# Altium PCB MB1293Cascii.PcbDoc (part 1 of 2)
Units mm, origin at the board's own origin, x right, y up, seen from the top; angles counter-clockwise.
Board outline 50.63 x 26.23 mm, 2 copper layers (Top Layer, Bottom Layer), stack 1.571 mm thick; 73 components, 55 nets, 560 pads, 45 vias.
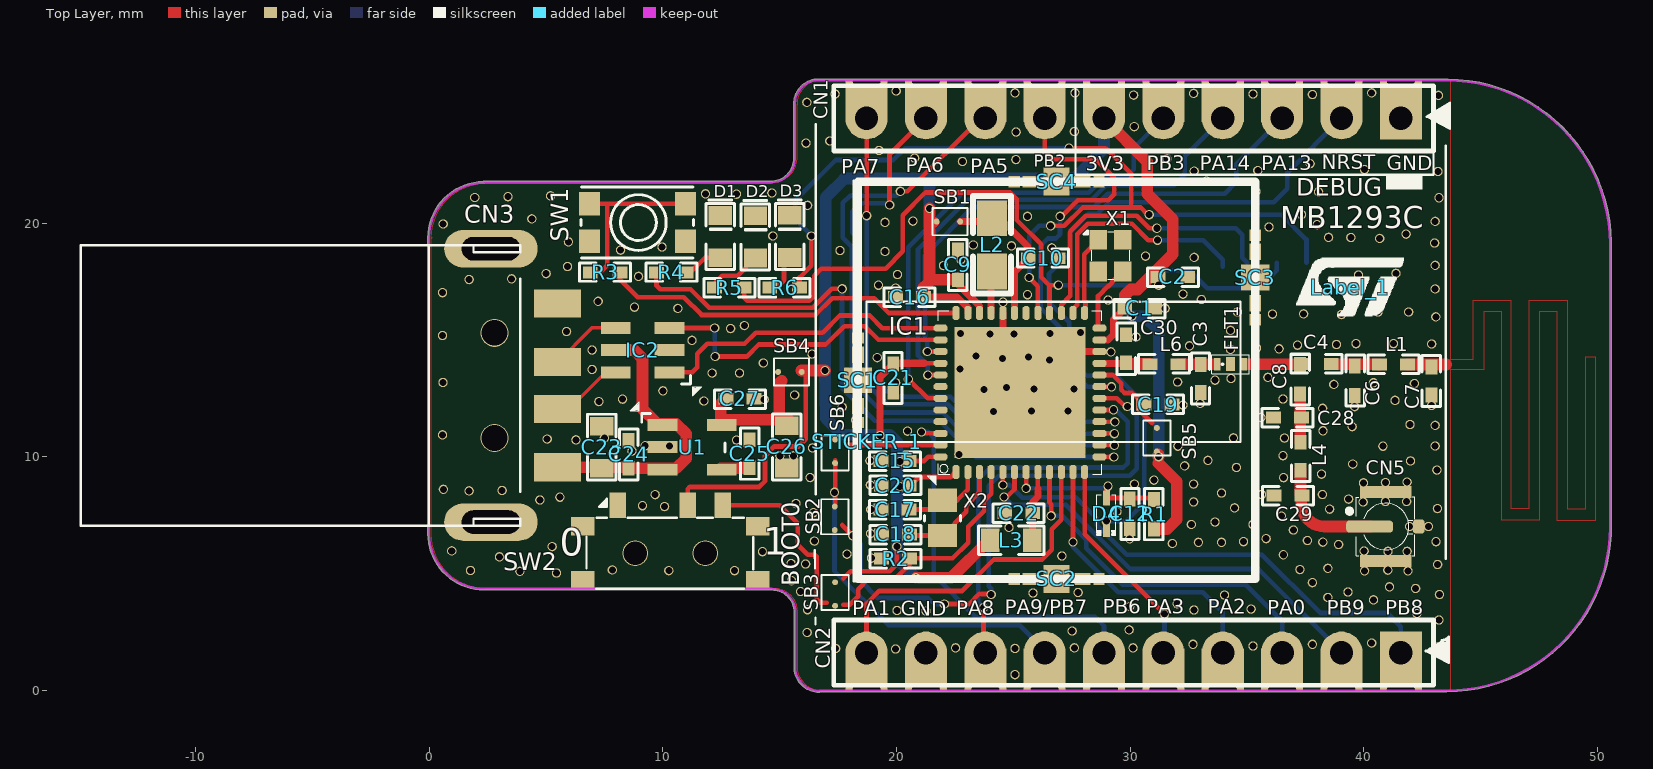
[diagram p0: Top Layer view]
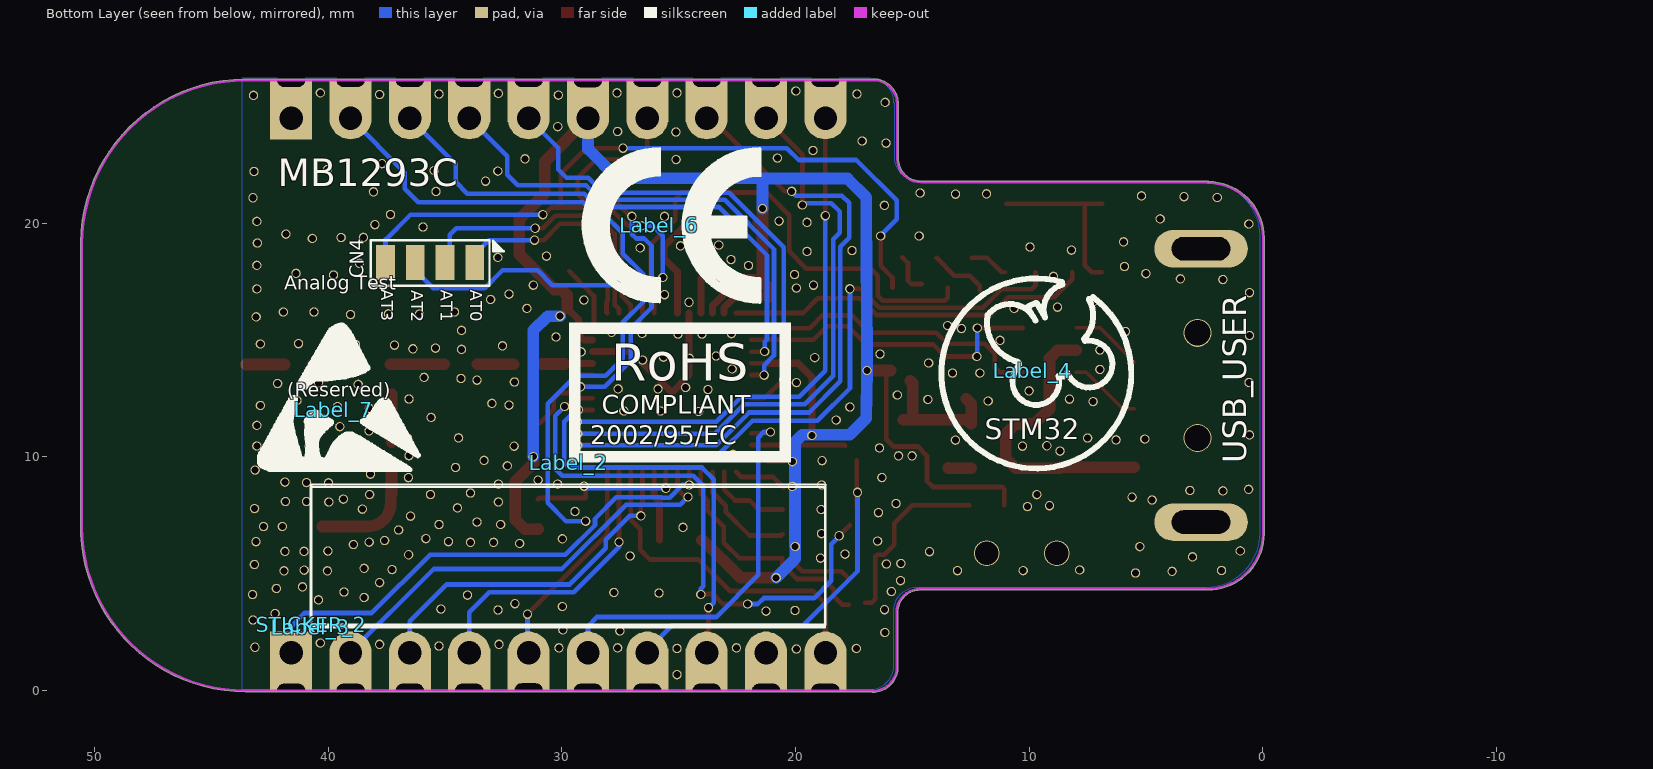
[diagram p1: Bottom Layer view, seen from below]

## Layer stack, top to bottom
Top Solder: solder mask 0.0102, Solder Resist, Dk 4.2
Top Layer: signal copper 0.0356
Dielectric1: prepreg 1.5, FR-4, Dk 4.4
Bottom Layer: signal copper 0.0356
Bottom Solder: solder mask 0.0102, Solder Resist, Dk 4.2

## Board outline
-0.051,6.716 cw(c-0.001,6.716) -0.051,6.724 -0.051,19.377 cw(c2.356,19.377) 2.326,21.783 cw(c2.356,21.743) 2.356,21.793 3.843,21.793 cw(c3.87,21.751) 3.87,21.801 14.63,21.801 cw(c14.63,21.751) 14.632,21.801 ccw(c14.63,22.771) 15.599,22.768 ccw(c14.63,22.771) 15.599,22.769 15.599,22.768 cw(c15.65,22.771) 15.599,22.773 15.599,25.101 cw(c16.67,25.101) 16.66,26.171 cw(c16.67,26.122) 16.67,26.172 43.568,26.172 cw(c43.568,26.122) 43.586,26.169 cw(c43.528,19.118) 50.578,19.194 cw(c50.53,19.178) 50.58,19.178 50.58,6.711 cw(c50.53,6.711) 50.573,6.685 cw(c43.53,7.001) 43.548,-0.05 cw(c43.54,0) 43.54,-0.05 16.72,-0.05 cw(c16.69,-0.01) 16.69,-0.06 cw(c16.69,1.01) 15.619,1.01 cw(c15.67,1.01) 15.625,1.033 15.625,3.341 cw(c15.675,3.341) 15.629,3.362 ccw(c14.66,3.341) 14.66,4.31 cw(c14.66,4.361) 14.63,4.32 2.385,4.32 cw(c2.355,4.361) 2.355,4.31 cw(c2.355,6.716)

## Design rules (kind name [scope] priority, off if disabled: settings)
AssemblyTestPointUsage [All] p0 off: scope1count=1 scope1_0_kind=Board scope1_0_value=Board scope2count=1 scope2_0_kind=Board scope2_0_value=Board commentlength=0
AssemblyTestPointUsage [All] p1 off:
AssemblyTestpoint [All] p0 off: scope1count=1 scope1_0_kind=Board scope1_0_value=Board scope2count=1 scope2_0_kind=Board scope2_0_value=Board commentlength=0
AssemblyTestpoint [All] p1 off: testpointundercomponent=TRUE minsize=1.016 maxsize=2.54 preferedsize=1.524 minholesize=0 maxholesize=1.016 preferedholesize=0.813 testpointgrid=0.025 usegrid=TRUE gridtolerance=0 allowsidetop=TRUE allowsidebottom=TRUE
Clearance Clearance_1 [All] p0: scope1count=1 scope1_0_kind=Board scope1_0_value=Board scope2count=1 scope2_0_kind=Board scope2_0_value=Board commentlength=0 gap=0.1
Clearance Clearance_PolyTop [All] p0 off: scope1count=1 scope1_0_kind=Board scope1_0_value=Board scope2count=1 scope2_0_kind=Layer scope2_0_value=TOP commentlength=48 gap=0.115 // Protel DXP Scope 1 Expression Was: InPolygon
Clearance Clearance_PolyTop [InPolygon vs OnLayer('Top Layer')] p1: gap=0.115 ignorepadtopadclearanceinfootprint=FALSE except(0: Arc-Hole Track-Hole SMDPad-Hole THPad-Hole Via-Hole Fill-Hole Poly-Hole Region-Hole Text-Hole)
Clearance Clearance_1 [All] p2: gap=0.1 ignorepadtopadclearanceinfootprint=FALSE except(0: Arc-Hole Track-Hole SMDPad-Hole THPad-Hole Via-Hole Fill-Hole Poly-Hole Region-Hole Text-Hole)
ComponentClearance [All] p0 off: scope1count=1 scope1_0_kind=Board scope1_0_value=Board scope2count=1 scope2_0_kind=Board scope2_0_value=Board commentlength=0 gap=0 collisioncheckmode=3
ComponentClearance [All] p1 off: gap=0 collisioncheckmode=3 verticalgap=0.254 showdistances=FALSE
DiffPairsRouting [All] p0: scope1count=1 scope1_0_kind=Board scope1_0_value=Board scope2count=1 scope2_0_kind=Board scope2_0_value=Board commentlength=0
DiffPairsRouting [All] p1: maxlimit=0.254 minlimit=0.254 mostfreqgap=0.254 toplayer_minwidth=0.1 toplayer_maxwidth=0.381 toplayer_prefwidth=0.381 bottomlayer_minwidth=0.1 bottomlayer_maxwidth=0.381 bottomlayer_prefwidth=0.381 maxuncoupledlength=12.7
FabricationTestPointUsage TestPointUsage [All] p0 off: scope1count=1 scope1_0_kind=Board scope1_0_value=Board scope2count=1 scope2_0_kind=Board scope2_0_value=Board commentlength=0 valid=0 allowmultiple=FALSE
FabricationTestPointUsage TestPointUsage [All] p1 off: valid=0 allowmultiple=FALSE
FabricationTestpoint Testpoint [All] p0 off: scope1count=1 scope1_0_kind=Board scope1_0_value=Board scope2count=1 scope2_0_kind=Board scope2_0_value=Board commentlength=0 side=3 testpointundercomponent=TRUE minsize=1.016 maxsize=2.54 preferedsize=1.524 minholesize=0.508 maxholesize=1.016 preferedholesize=0.813 testpointgrid=0.025
FabricationTestpoint Testpoint [All] p1 off: side=3 testpointundercomponent=TRUE minsize=1.016 maxsize=2.54 preferedsize=1.524 minholesize=0.508 maxholesize=1.016 preferedholesize=0.813 testpointgrid=0.025 allowsidetop=TRUE allowsidebottom=TRUE usegrid=TRUE gridtolerance=0
FanoutControl Fanout_Default [All] p0 off: scope1count=1 scope1_0_kind=Board scope1_0_value=Board scope2count=1 scope2_0_kind=Board scope2_0_value=Board commentlength=30 // Fanout_Default (Default Rule)
FanoutControl Fanout_Small [All] p0 off: scope1count=1 scope1_0_kind=Board scope1_0_value=Board scope2count=1 scope2_0_kind=Board scope2_0_value=Board commentlength=84 // Protel DXP Scope 1 Expression Was: (CompPinCount < 5)   Fanout_Small (Default Rule)
FanoutControl Fanout_SOIC [All] p0 off: scope1count=1 scope1_0_kind=Board scope1_0_value=Board scope2count=1 scope2_0_kind=Board scope2_0_value=Board commentlength=71 // Protel DXP Scope 1 Expression Was: IsSOIC   Fanout_SOIC (Default Rule)
FanoutControl Fanout_LCC [All] p0 off: scope1count=1 scope1_0_kind=Board scope1_0_value=Board scope2count=1 scope2_0_kind=Board scope2_0_value=Board commentlength=69 // Protel DXP Scope 1 Expression Was: IsLCC   Fanout_LCC (Default Rule)
FanoutControl Fanout_BGA [All] p0 off: scope1count=1 scope1_0_kind=Board scope1_0_value=Board scope2count=1 scope2_0_kind=Board scope2_0_value=Board commentlength=69 // Protel DXP Scope 1 Expression Was: IsBGA   Fanout_BGA (Default Rule)
FanoutControl Fanout_BGA [IsBGA] p1 off: bgadir=Out bgaviamode=Centered fanoutstyle=Auto fanoutdirection=Alternating viagrid=0.025 // Fanout_BGA (Default Rule)
FanoutControl Fanout_LCC [IsLCC] p2 off: bgadir=Out bgaviamode=Centered fanoutstyle=Auto fanoutdirection=Alternating viagrid=0.025 // Fanout_LCC (Default Rule)
FanoutControl Fanout_SOIC [IsSOIC] p3 off: bgadir=Out bgaviamode=Centered fanoutstyle=Auto fanoutdirection=Alternating viagrid=0.025 // Fanout_SOIC (Default Rule)
FanoutControl Fanout_Small [(CompPinCount < 5)] p4 off: bgadir=Out bgaviamode=Centered fanoutstyle=Auto fanoutdirection=OutThenIn viagrid=0.025 // Fanout_Small (Default Rule)
FanoutControl Fanout_Default [All] p5 off: bgadir=Out bgaviamode=Centered fanoutstyle=Auto fanoutdirection=Alternating viagrid=0.025 // Fanout_Default (Default Rule)
Height [All] p0: scope1count=1 scope1_0_kind=Board scope1_0_value=Board scope2count=1 scope2_0_kind=Board scope2_0_value=Board commentlength=0
HoleSize [All] p0: scope1count=1 scope1_0_kind=Board scope1_0_value=Board scope2count=1 scope2_0_kind=Board scope2_0_value=Board commentlength=0 absolutevalues=TRUE maxlimit=3.5 minlimit=0.2 maxpercent=80.000 minpercent=20.000
HoleSize [All] p1: absolutevalues=TRUE maxlimit=3.5 minlimit=0.2 maxpercent=80.000 minpercent=20.000
HoleToHoleClearance [All] p0 off: scope1count=1 scope1_0_kind=Board scope1_0_value=Board scope2count=1 scope2_0_kind=Board scope2_0_value=Board commentlength=0
HoleToHoleClearance [All] p1 off: gap=0.254 allowstackedmicrovias=TRUE
LayerPairs [All] p0: scope1count=1 scope1_0_kind=Board scope1_0_value=Board scope2count=1 scope2_0_kind=Board scope2_0_value=Board commentlength=0 enforce=TRUE
MinimumSolderMaskSliver [All] p0 off: scope1count=1 scope1_0_kind=Board scope1_0_value=Board scope2count=1 scope2_0_kind=Board scope2_0_value=Board commentlength=0
MinimumSolderMaskSliver [All] p1 off: minsoldermaskwidth=0.254
NetAntennae [All] p0 off: scope1count=1 scope1_0_kind=Board scope1_0_value=Board scope2count=1 scope2_0_kind=Board scope2_0_value=Board commentlength=0
NetAntennae [All] p1 off: netantennaetolerance=0
PasteMaskExpansion [All] p0 off: scope1count=1 scope1_0_kind=Board scope1_0_value=Board scope2count=1 scope2_0_kind=Board scope2_0_value=Board commentlength=0 expansion=0
PasteMaskExpansion [All] p1 off: expansion=0
PlaneClearance [All] p0: scope1count=1 scope1_0_kind=Board scope1_0_value=Board scope2count=1 scope2_0_kind=Board scope2_0_value=Board commentlength=0 clearance=0.508
PlaneConnect [All] p0: scope1count=1 scope1_0_kind=Board scope1_0_value=Board scope2count=1 scope2_0_kind=Board scope2_0_value=Board commentlength=0 planeconnectstyle=Relief reliefexpansion=0.508 reliefentries=4 reliefconductorwidth=0.254 reliefairgap=0.254
PolygonConnect [All] p0: scope1count=1 scope1_0_kind=Board scope1_0_value=Board scope2count=1 scope2_0_kind=Board scope2_0_value=Board commentlength=0 connectstyle=Direct reliefconductorwidth=0.254 reliefentries=4 polygonreliefangle="90 Angle"
PolygonConnect [All] p1: connectstyle=Direct reliefconductorwidth=0.254 reliefentries=4 polygonreliefangle="90 Angle" airgapwidth=0.254
RoutingCorners [All] p0: scope1count=1 scope1_0_kind=Board scope1_0_value=Board scope2count=1 scope2_0_kind=Board scope2_0_value=Board commentlength=0 cornerstyle=45-Degree minsetback=2.54 maxsetback=2.54
RoutingLayers [All] p0: scope1count=1 scope1_0_kind=Board scope1_0_value=Board scope2count=1 scope2_0_kind=Board scope2_0_value=Board commentlength=0 top layer=Horizontal bottom layer=Vertical
RoutingPriority [All] p0: scope1count=1 scope1_0_kind=Board scope1_0_value=Board scope2count=1 scope2_0_kind=Board scope2_0_value=Board commentlength=0
RoutingTopology [All] p0 off: scope1count=1 scope1_0_kind=Board scope1_0_value=Board scope2count=1 scope2_0_kind=Board scope2_0_value=Board commentlength=0 topology=Shortest
RoutingTopology [All] p1 off: topology=Shortest
RoutingVias [All] p0: scope1count=1 scope1_0_kind=Board scope1_0_value=Board scope2count=1 scope2_0_kind=Board scope2_0_value=Board commentlength=0 holewidth=0.4 width=0.6 viastyle="Through Hole" minholewidth=0.2 minwidth=0.3 maxholewidth=6 maxwidth=10
RoutingVias [All] p1: holewidth=0.4 width=0.6 viastyle="Through Hole" minholewidth=0.2 minwidth=0.3 maxholewidth=6 maxwidth=10
ShortCircuit [All] p0: scope1count=1 scope1_0_kind=Board scope1_0_value=Board scope2count=1 scope2_0_kind=Board scope2_0_value=Board commentlength=0 allowed=FALSE
SilkToBoardRegionClearance [All] p0 off: scope1count=1 scope1_0_kind=Board scope1_0_value=Board scope2count=1 scope2_0_kind=Board scope2_0_value=Board commentlength=0
SilkToBoardRegionClearance [All] p1 off:
SilkToSilkClearance [All] p0 off: scope1count=1 scope1_0_kind=Board scope1_0_value=Board scope2count=1 scope2_0_kind=Board scope2_0_value=Board commentlength=0
SilkToSilkClearance [All] p1 off: silktosilkclearance=0.254
SilkToSolderMaskClearance SilkscreenOverComponentPads [All] p0 off: scope1count=1 scope1_0_kind=Board scope1_0_value=Board scope2count=1 scope2_0_kind=Board scope2_0_value=Board commentlength=44 // Protel DXP Scope 1 Expression Was: IsPad
SilkToSolderMaskClearance SilkscreenOverComponentPads [IsPad] p1 off: minsilkscreentomaskgap=0.254 clearancetoexposedcopper=TRUE
SolderMaskExpansion [All] p0 off: scope1count=1 scope1_0_kind=Board scope1_0_value=Board scope2count=1 scope2_0_kind=Board scope2_0_value=Board commentlength=0 expansion=0.102
SolderMaskExpansion [All] p1 off: expansion=0.102 istentingtop=FALSE
UnRoutedNet [All] p0: scope1count=1 scope1_0_kind=Board scope1_0_value=Board scope2count=1 scope2_0_kind=Board scope2_0_value=Board commentlength=0
UnpouredPolygon [All] p0: scope1count=1 scope1_0_kind=Board scope1_0_value=Board scope2count=1 scope2_0_kind=Board scope2_0_value=Board commentlength=0
Width [All] p0: scope1count=1 scope1_0_kind=Board scope1_0_value=Board scope2count=1 scope2_0_kind=Board scope2_0_value=Board commentlength=0 maxlimit=5 minlimit=0.1 preferedwidth=0.2
Width [All] p1: maxlimit=5 minlimit=0.1 preferedwidth=0.2 minimp=50.000000 maximp=50.000000 favimp=50.000000
10 further rules are at their usual default settings.

## Classes and differential pairs
component class Schematic: C1 C2 C3 C4 C6 C7 C8 C9 C10 C12 C15 C16 C17 C18 C19 C20 C21 C22 C23 C24 C25 C26 C27 C28 C29 C30 CN1 CN2 CN3 CN4 CN5 D1 D2 D3 D4 FLT1 IC1 IC2 L1 L2 L3 L4 L6 R1 R2 R3 R4 R5 R6 R39 R40 R41 SB1 SB2 SB3 SB4 SB5 SB6 SC1 SC2 SC3 SC4 SW1 SW2 U1 X1 X2
component class Project_Overview: Label_1 Label_2 Label_3 Label_4 Label_5 Label_6 Label_7 Label_9 STICKER_2
differential pair " ": +USB_P -USB_N

## Components (designator, comment, footprint, x,y, rotation, side; value= is the part's Value field where it differs from the comment)
C1 "100nF" 0402_CAP_NPOL#1 30.404,16.358 r180 top
C2 "100pF" 0402_CAP_NPOL#1 31.826,17.704 r180 top
C3 "0.3pF" 0402_CAP_NPOL#2 33.02,13.36 r90 top
C4 "10nF" 0402_CAP_NPOL#1 37.97,13.974 r0 top
C6 "NF" 0402_CAP_NPOL#1 39.61,13.264 r270 top
C7 "1.5pF" 0402_CAP_NPOL#2 42.9,13.254 r90 top
C8 "NF" 0402_CAP_NPOL#1 37.27,13.324 r270 top
C9 "4.7uF" 0402_CAP_NPOL#1 22.631,18.217 r90 top
C10 "4.7uF" 0402_CAP_NPOL#1 26.27,18.501 r0 top
C12 "100nF" 0402_CAP_NPOL#1 29.98,7.561 r270 top
C15 "100nF" 0402_CAP_NPOL#2 19.94,9.831 r180 top
C16 "100nF" 0402_CAP_NPOL#2 20.56,16.841 r180 top
C17 "10pF" 0402_CAP_NPOL#2 19.94,7.751 r180 top
C18 "10pF" 0402_CAP_NPOL#2 19.96,6.691 r180 top
C19 "100nF" 0402_CAP_NPOL#2 31.191,12.243 r0 top
C20 "100nF" 0402_CAP_NPOL#2 19.95,8.771 r0 top
C21 "100nF" 0402_CAP_NPOL#2 19.863,13.386 r90 top
C22 "100nF" 0402_CAP_NPOL#2 25.23,7.601 r180 top
C23 "1uF" 0603_CAP_NPOL 7.391,10.419 r270 top
C24 "100nF" 0402_CAP_NPOL#2 8.534,10.114 r270 top
C25 "10nF" 0402_CAP_NPOL#2 13.716,10.14 r270 top
C26 "1uF" 0603_CAP_NPOL 15.3,10.431 r90 top
C27 "100nF" 0402_CAP_NPOL#2 13.3,12.491 r180 top
C28 "NF" 0402_CAP_NPOL#2 36.728,11.684 r180 top
C29 "NF" 0402_CAP_NPOL#2 36.754,8.357 r180 top
C30 "0.8pF" 0402_CAP_NPOL#2 29.82,14.63 r270 top
CN1 "HEADER_1X10" "Header M/F 1x10x2.54 NF" 41.58,24.491 r180 top
CN2 "HEADER_1X10" "Header M/F 1x10x2.54 NF" 41.58,1.631 r180 top
CN3 "USB_1" USB/A_M1 3.9,13.061 r90 top
CN4 "HEADER_1X4" SIL4_127_B 33.731,18.313 r270 bottom
CN5 "UFL" UFL 40.93,7.024 r90 top (schematic designator J2)
D1 "LED BLUE" 0603_LED_Blue 12.466,19.43 r270 top
D2 "LED GREEN" 0603_LED_GREEN 13.966,19.42 r270 top
D3 "LED RED" 0603_LED_RED 15.426,19.44 r270 top
D4 "BAT54K" SOD523 28.98,7.571 r270 top
FLT1 "LFB182G45CGFD436" LFB182G45CGFD436 34.29,13.97 r0 top
IC1 "STM32WBxx_QFN48" STM32WBxx_QFN48 25.29,12.761 r90 top
IC2 "USBLC6-2" SOT23-6 10.29,13.621 r180 top
L1 "3.6nH" 0402_COIL 41.27,13.954 r0 top
L2 "10uH" 0805_COIL 24.09,20.221 r270 top
L3 "FCM1608KF-601T03" 0603_COIL 24.91,6.441 r0 top
L4 "0R" 0402_COIL 37.28,10.034 r270 top
L6 "2.7nH" 0402_COIL 31.445,13.97 r0 top
Label_1 "LOGO_ST" LOGO_ST_Size2 39.421,17.272 r0 top
Label_2 "LOGO_ROHS" SYMBOL_RoHS 29.693,9.754 r180 bottom
Label_3 "LOGO_StickerArea_Prod_Reservation" LOGO_Sticker_Area 40.742,2.718 r180 bottom
Label_4 "LOGO_STM32" LOGO_STM32 9.855,13.691 r180 bottom
Label_6 "LOGO_CE" "LOGO CE" 25.832,19.914 r180 bottom
Label_7 "LOGO_ESD" "LOGO ESD" 39.751,12.014 r180 bottom
R1 "100K" 0402_RES#1 31.02,7.551 r90 top
R2 "10K" 0402_RES#2 19.96,5.651 r180 top
R3 "1K" 0402_RES#1 7.53,17.901 r0 top
R4 "680" 0402_RES#1 10.37,17.901 r0 top
R5 "680" 0402_RES#1 12.852,17.247 r180 top
R6 "680" 0402_RES#1 15.215,17.247 r180 top
SB1 "Open" SB-tiny 22.225,20.071 r180 top
SB2 "Close" SB-tiny 17.36,7.378 r270 top
SB3 "Open" SB-tiny 17.374,4.14 r270 top
SB4 "Close" SB-tiny 15.443,13.64 r180 top
SB5 "Open" SB-tiny 31.14,10.744 r270 top
SB6 "Open" SB-tiny 17.374,10.236 r90 top
SC1 "Shield Clip_A 3.9x1.1x1.28" "Shield Clip_A 3.9x1.1x1.28" 18.35,13.28 r90 top locked
SC2 "Shield Clip_A 3.9x1.1x1.28" "Shield Clip_A 3.9x1.1x1.28" 26.85,4.78 r180 top
SC3 "Shield Clip_A 3.9x1.1x1.28" "Shield Clip_A 3.9x1.1x1.28" 35.35,17.678 r90 top
SC4 "Shield Clip_A 3.9x1.1x1.28" "Shield Clip_A 3.9x1.1x1.28" 26.85,21.78 r180 top locked
SH1 "Shield 17.2x17.2x3" "SHIELD 17.2X17.2X3" 0.356,-23.927 r0 top
STICKER_1 "FCC_ID_Sticker_16x6" "Sticker_FCC_ID 16x6mm" 18.72,10.643 r0 top
STICKER_2 "Sticker_Prod_22x6" Sticker_Prod_22x6mm 40.716,2.819 r180 bottom
SW1 "User PB" "SW-PB SMD KMR2" 8.92,20.031 r180 top
SW2 "MLL1200S_TE" MLL1200S_TE 10.32,5.881 r0 top
U1 "LD3985M33R" SOT23-5 11.26,10.408 r0 top
X1 "NX2016_32MHz" NX2016_4P 29.159,18.618 r270 top
X2 "NX2012_32K768Hz" NX2012_2P 21.97,8.141 r270 top

## Footprints (in the part's own frame and the unit in brackets; to place one, negate y for a bottom-side part, rotate by r counter-clockwise, add the part's x,y. Pads: shape width x height; smd on the part's side, far side on the other; paste and mask are expansions set on the pad)
0402_CAP_NPOL#1 [mil] "Capacitor FootPrint 0402"
  rect 25x20 smd: 1(-25,0) 2(25,0)
  silkscreen extent -43,-15 43,16
0402_CAP_NPOL#2 [mil] "Capacitor FootPrint 0402"
  rect 25x20 smd: 1(-23.58,0) 2(23.58,0)
  silkscreen extent -43,-15 43,16
0402_COIL [mil] "Coil FootPrint 0402"
  rect 25x20 smd: 1(-23.58,0) 2(23.58,0)
  silkscreen extent -43,-15 43,16
0402_RES#1 [mil] "Resistor FootPrint 0402"
  rect 25x20 smd: 1(-25,0) 2(25,0)
  silkscreen extent -43,-15 43,16
0402_RES#2 [mil] "Resistor FootPrint 0402"
  rect 25x20 smd: 1(-23.58,0) 2(23.58,0)
  silkscreen extent -43,-15 43,16
0603_CAP_NPOL [mm] "Capacitor FootPrint 0603"
  rect 0.8x1 smd: 1(-0.902,0) 2(0.902,0)
  silkscreen extent -1.41,-0.61 1.41,0.61
0603_COIL [mm] "Coil Footprint 0603"
  rect 0.8x1 smd: 1(-0.902,0) 2(0.902,0)
  silkscreen extent -1.41,-0.61 1.41,0.61
0603_LED_Blue [mm] "Resistor Footprint 0603"
  rect 0.8x1 smd: A(0.902,0) K(-0.902,0)
  silkscreen extent -1.59,-0.61 1.41,0.61
0603_LED_GREEN [mm] "Resistor Footprint 0603"
  rect 0.8x1 smd: A(0.902,0) K(-0.902,0)
  silkscreen extent -1.59,-0.61 1.41,0.61
0603_LED_RED [mm] "Resistor Footprint 0603"
  rect 0.8x1 smd: A(0.902,0) K(-0.902,0)
  silkscreen extent -1.59,-0.61 1.41,0.61
0805_COIL [mil] "Coil FootPrint 0805"
  rect 60x50 smd: 1(0,0) 2(90,0)
  silkscreen extent -37,-32 127,32
"Header M/F 1x10x2.54 NF" [mm] "1x10x2.54 Header Not Fitted"
  rect 1.8x1.8 hole 1: 1(0,0)
  round 1.8 hole 1: 2(2.54,0) 3(5.08,0) 4(7.62,0) 5(10.16,0) 6(12.7,0) 7(15.24,0) 8(17.78,0) 9(20.32,0) 10(22.86,0)
  silkscreen extent -1.4,-1.4 24.26,1.4
LFB182G45CGFD436 [mm] "Band Pass Filter Murata LFB182G45CGFD436"
  rect 0.28x0.55 smd mask+0: 1(-0.56,0) 3(0.56,0)
  rect 0.4x0.6 smd mask+0: 2(0,0)
  silkscreen extent -0.8,-0.4 0.8,0.4
"LOGO CE" [mm]
  silkscreen extent -3.27,-3.31 4.33,3.3
"LOGO ESD" [mm]
  silkscreen extent -3.23,-2.59 3.66,3.68
LOGO_ST_Size2 [mm]
  silkscreen extent -2.31,-1.22 2.29,1.24
LOGO_Sticker_Area [mm] "Sticker Area reservation 22x6 mm"
  silkscreen extent 0,0 22,6
LOGO_STM32 [mm]
  silkscreen extent -3.9,-4.18 4.22,3.95
MLL1200S_TE [mm] "1RT switch"
  rect 1x0.8 smd mask+0: 0(-3.75,-1.15) 0(-3.75,1.15) 0(3.75,-1.15) 0(3.75,1.15)
  round 1.1 hole 1 mask+0: 0(-1.5,0) 0(1.5,0)
  rect 0.7x1.1 smd mask+0: 1(-2.25,2.05) 2(0.75,2.05) 3(2.25,2.05)
  silkscreen extent -3.58,-1.52 3.56,2.34
NX2012_2P [mm]
  rect 1x1.25 smd: 1(0,0) 2(1.5,0)
  silkscreen extent 0.63,-0.76 0.89,0.76
NX2016_4P [mm]
  rect 0.85x0.75 smd mask+0: 1(-0.675,-0.525) 2(0.675,-0.525) 3(0.675,0.525) 4(-0.675,0.525)
  silkscreen extent -1.07,-1.16 1.02,0.81
SB-tiny [mil]
  round 10 smd paste-10 mask+0: 1(-19.69,0)
  round 10 smd paste-10.08 mask+0: 2(20,0)
  silkscreen extent -32,-23 27,23
"SHIELD 17.2X17.2X3" [mm] "Metallic Shield 17.2x17.2mm height =3mm tickness=0.2mm"
  silkscreen extent 17.81,28.6 35.08,45.75
"Shield Clip_A 3.9x1.1x1.28" [mm] "Shield Clip 3.9x1.1x1.28 - Harwin S0951-46R - Full pad"
  rect 0.48x0.5 smd mask+0: 1(-1.81,0) 1(1.81,0)
  rect 0.7x0.5 smd mask+0: 1(-1.1,0) 1(1.1,0)
  rect 1.1x1.2 smd mask+0: 1(0,0)
SIL4_127_B [mm]
  rect 1.5x0.8 smd: 1(0,0) 2(0,-1.27) 3(0,-2.54) 4(0,-3.81)
  silkscreen extent -0.97,-4.44 0.99,1.24
SOD523 [mm]
  rect 0.65x0.3 smd mask+0: A(-0.675,0) K(0.675,0)
  silkscreen extent -0.81,-0.41 0.91,0.41
SOT23-5 [mil]
  rect 50x20 smd: 1(-50,37.5) 2(-50,0.5) 3(-50,-37.5) 4(50,-37.5) 5(50,37.5)
  silkscreen extent -104,-8 55,77
SOT23-6 [mm]
  rect 1.27x0.508 smd: 1(0,0) 2(0,-0.95) 3(0,-1.9) 4(2.3,-1.9) 5(2.3,-0.95) 6(2.3,0)
  silkscreen extent -1.37,0.13 -0.51,1
"Sticker_FCC_ID 16x6mm" [mm] "Sticker_FCC_ID 16x6mm White"
  silkscreen extent 0,0 16,6
Sticker_Prod_22x6mm [mm] "Sticker_Prod_22x6mm White"
  silkscreen extent 0,0 22,6
STM32WBxx_QFN48 [mm] "QFN48 7x7x0.55mm pitch 0.5mm"
  oct 0.6x0.3 smd mask+0: 1(-3.398,2.746) 2(-3.398,2.239) 3(-3.398,1.739) 4(-3.398,1.239) 5(-3.398,0.739) 6(-3.398,0.239) 7(-3.398,-0.261) 8(-3.398,-0.761) 9(-3.398,-1.261) 10(-3.398,-1.761) 11(-3.398,-2.261) 12(-3.398,-2.761) 25(3.398,-2.761) 26(3.398,-2.261) 27(3.398,-1.761) 28(3.398,-1.261) 29(3.398,-0.761) 30(3.398,-0.261) 31(3.398,0.239) 32(3.398,0.739) 33(3.398,1.239) 34(3.398,1.739) 35(3.398,2.239) 36(3.398,2.739)
  oct 0.3x0.6 smd mask+0: 13(-2.752,-3.399) 14(-2.252,-3.399) 15(-1.752,-3.399) 16(-1.252,-3.399) 17(-0.752,-3.399) 18(-0.252,-3.399) 19(0.248,-3.399) 20(0.748,-3.399) 21(1.248,-3.399) 22(1.748,-3.399) 23(2.248,-3.399) 24(2.748,-3.399) 37(2.748,3.399) 38(2.248,3.399) 39(1.748,3.399) 40(1.248,3.399) 41(0.748,3.399) 42(0.248,3.399) 43(-0.252,3.399) 44(-0.752,3.399) 45(-1.252,3.399) 46(-1.752,3.399) 47(-2.252,3.399) 48(-2.752,3.399)
  rect 5.6x5.6 smd paste-3 mask+0: 49(0,0)
  silkscreen extent -3.95,-3.5 3.5,3.96
"SW-PB SMD KMR2" [mm]
  rect 0.9x1 smd: 1(-2.05,0.8) 1(2.05,0.8) 2(-2.05,-0.8) 2(2.05,-0.8)
  silkscreen extent -2.4,-1.52 2.42,1.53
SYMBOL_RoHS [mm]
  silkscreen extent 0,0 9.5,6
UFL [mm] "UFL RF connector SMD"
  rrect50% 0.5x2 smd: 1(0,0.686)
  rect 0.5x2.2 smd: 2(-1.475,0) 2(1.475,0)
  rrect50% 0.6x0.5 smd: 2(0,-1.422)
  silkscreen extent -1.25,-1.25 1.27,1.6
USB/A_M1 [mm]
  round 1.2 hole 1.1: 0(-2.25,1.1) 0(2.25,1.1)
  rect 1.2x2 smd: 1(-3.5,-1.6) 2(-1,-1.6) 3(1,-1.6) 4(3.5,-1.6)
  oval 1.6x4 hole 1 slot 2.5 at 90 deg: 5(-5.85,1.25) 5(5.85,1.25)
  silkscreen extent -6,0 6,18.8

## Part data
C1 C2 C3 C4 C6 C7 C8 C9 C10 C12 C15 C16 C17 C18 C19 C20 C21 C22 C23 C24 C25 C26 C27 C28 C29 C30: library part CAP_NPOL, "Capacitor_not polarized"
D1 D2 D3: library part LED, "Light-Emitting Diode"
D4: "Schottky Diode"
FLT1: "Band Pass Filter Murata LFB182G45CGFD436"
L1 L4 L6: library part INDUCTOR_SMD_STDL
L2: library part IND_74479777310A, "Coil Wurtz 10uH ref: 74479777310A"
L3: library part IND_FCM1608KF-601T03
Label_3: "Area Resevation for Prod Sticker 22x6mm"
R1 R2 R3 R4 R5 R6: library part RES, "Resistor"
SB1 SB2 SB3 SB4 SB5 SB6: library part Strap2, "Solder Jumper"
SC1 SC2 SC3 SC4: "Harwin S0951-46R"
SH1: library part Shield, "Shield"
STICKER_1: library part LOGO_Sticker_FCC_ID, "Sticker for FCC_ID 16x6mm"
STICKER_2: library part LOGO_Sticker_Prod, "Prod Sticker 22x6mm"
SW1: library part SW-PB_1, "Push-button SMD"
U1: "3.3V low drop voltage regulator"
X1: library part NX2016_32M, "Crystal NDK 2.0x1.6mm  32 MHz"
X2: library part NX2012_32K768, "Crystal NDK 2.0x1.2mm  32.768 KHz"

## Free pads (board coordinates)
  rect 1.8x1.8 hole 0.6 slot 1.2 at 0 deg copper offset 0,0.9 mask+0: 2(18.72,-0.005) 2(21.26,-0.005) 2(23.8,-0.005) 2(26.34,-0.005) 2(28.88,-0.005) 2(31.42,0.01) 2(33.96,-0.005) 2(36.5,-0.005) 2(39.04,-0.005) 2(41.58,-0.005)
  rect 1.8x1.8 hole 0.6 slot 1.2 at 0 deg copper offset 0,-0.9 mask+0: 2(18.72,26.136) 2(21.26,26.136) 2(23.8,26.136) 2(26.34,26.136) 2(28.88,26.121) 2(31.42,26.136) 2(33.96,26.136) 2(36.5,26.136) 2(39.04,26.136) 2(41.58,26.136)
  round 0.4 hole 0.3 mask+0: 24(29.98,6.501) 25(7.5,10.811) 26(10.29,10.461) 27(8.68,10.251) 28(13.16,10.721) 29(15.01,10.051) 30(15.59,10.051) 31(9.25,10.481) 32(14.34,12.461) 33(19.507,20.041) 34(27.61,23.927) 35(29.17,14.501) 36(18.93,5.671) 37(18.89,6.721) 38(18.9,7.751) 39(18.88,8.801) 40(18.86,9.841) 41(20.14,9.801) 42(20.14,8.741) 43(24.56,16.621) 44(42.9,12.204) 45(39.6,12.154) 46(35.59,11.694) 47(35.62,8.394) 48(39.98,8.894) 49(40.92,8.904) 50(41.85,8.924) 51(39.97,8.074) 52(40.92,8.094) 53(41.83,8.094) 54(42.76,7.024) 55(41.96,7.024) 56(41.85,5.964) 57(41.03,5.964) 58(40.01,5.974) 59(40.03,5.131) 60(41.021,5.156) 61(41.885,5.131) 62(34.29,14.605) 63(32.258,16.967) 64(31.496,16.358) 65(30.074,16.027) 69(26.645,18.948) 70(29.058,16.713) 71(32.995,12.294) 74(19.964,17.226) 76(22.758,18.445) 77(19.177,14.249) 78(29.958,2.603) 79(22.743,15.278) 80(22.708,13.772) 81(23.749,12.883) 82(26.561,15.288) 83(27.587,12.918) 84(27.865,15.336) 85(22.669,10.112) 86(25.026,15.259) 87(23.999,15.259) 88(24.7,12.976) 89(25.88,12.918) 90(26.542,14.146) 91(23.395,14.319) 92(24.537,14.223) 93(25.649,14.271) 94(24.143,11.949) 95(25.774,11.969) 96(27.347,11.969) 97(27.076,5.766) 99(27.52,2.552) 100(25.843,4.178) 101(27.774,4.203) 102(32.01,3.721) 103(16.18,2.489) 104(16.114,5.418) 105(16.191,3.464) 106(32.726,3.454) 107(35.175,3.491) 108(36.551,5.817) 109(40.411,3.886) 110(37.795,4.623) 111(34.468,7.823) 112(42.215,4.374) 113(38.456,3.988) 114(42.266,3.302) 115(32.715,8.077) 116(33.909,6.35) 117(35.82,6.504) 118(37.58,6.424) 119(38.92,6.254) 120(32.334,9.623) 121(32.715,8.839) 122(17.583,18.834) 123(13.487,15.621) 124(17.677,12.137) 125(18.258,11.578) 126(14.707,19.456) 127(14.3,14.021) 128(12.116,13.589) 129(12.903,15.494) 130(20.041,17.805) 131(22.821,22.644) 132(19.228,17.348) 133(37.7,22.549) 134(35.381,21.363) 135(35.458,22.255) 136(33.261,21.799) 137(32.741,22.23) 138(31.572,22.758) 139(25.121,23.901) 142(25.108,22.724) 143(30.174,24.133) 144(25.603,20.295) 145(22.012,18.189) 146(23.285,19.07) 147(24.924,19.035) 148(19.507,18.796) 149(20.701,20.091) 150(33.045,16.739) 151(32.537,14.757) 152(35.408,14.656) 153(37.16,14.783) 154(38.827,14.813) 155(39.663,14.848) 156(41.264,14.848) 157(42.901,14.836) 158(43.075,15.997) 159(43.052,17.192) 160(43.052,18.202) 161(43.029,19.153) 162(43.052,20.082) 163(43.052,11.354) 164(43.052,10.472) 165(43.122,9.439) 166(43.145,7.791) 167(43.087,6.375) 168(43.156,5.4) 169(43.133,1.859) 170(43.191,25.473) 171(43.168,22.218) 172(43.214,21.092) 173(37.33,20.372) 174(38.061,21.347) 175(7.264,12.37) 175(8.28,12.471) 175(16.383,14.402) 175(16.408,10.389) 175(40.023,22.299) 176(38.49,19.397) 177(35.941,19.837) 178(34.29,15.418) 179(19.253,23.114) 180(37.998,19.939) 181(38.659,18.288) 182(30.251,15.138) 183(34.59,16.205) 184(36.088,16.113) 185(37.422,16.125) 186(33.63,13.284) 187(32.029,13.208) 188(34.315,13.36) 189(38.711,13.107) 190(38.235,12.085) 191(41.334,12.422) 192(40.406,13.176) 193(42.158,13.142) 194(38.247,11.122) 195(38.189,9.265) 196(38.223,8.394) 197(36.598,10.808) 198(36.564,9.114) 199(36.54,12.48) 200(35.89,13.409) 201(36.373,14.63) 202(32.037,10.46) 203(36.471,7.466) 204(36.98,6.874) 205(38.24,6.354) 206(38.537,7.767) 207(39.349,8.197) 208(36.54,10.054) 209(32.258,12.217) 210(34.416,10.819) 211(33.325,9.856) 212(34.544,9.55) 213(32.614,7.112) 214(35.252,7.11) 215(39.5,11.296) 216(41.973,11.389) 217(41.996,9.833) 218(39.523,9.694) 219(40.812,10.46) 220(39.44,19.389) 221(41.807,19.535) 222(39.039,16.093) 223(40.605,16.202) 224(41.917,16.202) 225(40.678,19.352) 226(39.767,17.786) 227(41.37,17.859) 228(0.971,5.983) 229(1.772,5.145) 230(3.885,5.109) 231(5.452,5.036) 232(5.27,6.165) 233(3.011,5.728) 234(0.607,19.972) 235(1.955,21.101) 236(3.375,21.137) 237(5.197,21.174) 238(4.395,20.19) 239(5.962,19.207) 240(5.925,18.15) 241(7.239,16.662) 242(8.788,16.408) 243(5.597,8.278) 244(9.677,8.387) 245(9.131,7.914) 246(10.078,7.877) 247(14.267,5.947) 248(15.494,5.441) 249(15.697,8.006) 250(15.506,4.708) 251(13.284,13.589) 252(11.754,12.395) 253(10.005,12.832) 254(15.646,12.649) 255(16.307,9.119) 256(16.453,7.617) 257(20.023,3.433) 258(20.777,22.789) 259(16.125,23.427) 260(16.162,25.176) 261(16.198,20.768) 262(9.969,18.988) 263(8.195,18.85) 264(8.966,17.729) 265(10.643,16.358) 266(11.249,14.991) 267(13.153,21.245) 268(14.665,21.296) 269(11.827,21.262) 270(0.577,17.03) 271(0.577,15.195) 272(0.594,13.19) 273(0.577,10.947) 274(0.611,8.618) 275(4.74,8.16) 276(5.012,17.846) 277(3.534,17.625) 278(1.716,17.591) 279(1.716,8.55) 280(3.126,8.567) 281(31.801,6.299) 282(31.013,9.009) 283(15.9,4.242) 284(5.885,15.368) 285(6.978,14.574) 286(6.978,13.746) 287(6.283,10.732) 288(5.057,10.765) 289(7.839,5.169) 290(10.257,5.135) 291(13.072,5.135) 292(21.26,3.404) 293(29.98,3.601) 294(32.918,6.35) 295(20.472,11.105) 296(17.374,25.532) 297(17.399,1.808) 298(19.964,1.783) 299(22.53,1.834) 300(25.07,1.808) 301(27.61,1.834) 302(30.124,1.834) 303(32.69,1.986) 304(35.255,1.91) 305(37.795,1.986) 306(40.335,2.037) 307(43.205,3.023) 308(19.99,25.659) 309(25.07,25.583) 310(27.635,25.583) 311(30.15,25.481) 312(32.715,25.557) 313(35.255,25.532) 314(37.795,25.507) 315(40.335,25.583) 317(41.097,4.445) 318(38.456,5.237) 319(43.231,4.115) 320(34.036,4.089) 321(39.319,4.221) 323(33.909,8.458) 324(33.63,7.214) 325(34.849,6.375) 326(37.262,5.182) 327(24.816,6.99) 328(16.485,6.401) 329(17.882,5.842) 330(17.145,23.52) 582(19.304,10.922) 583(19.964,13.183) 585(30.658,18.593) 586(32.741,18.542) 587(30.175,8.839) 588(29.439,7.671) 589(25.07,0.686) 590(25.603,16.942)

## Via types
v1: diameter 0.4, hole 0.3, Top Layer to Bottom Layer, tented both sides, 45 vias